# Altium PCB 血压计.PcbDoc
Units mm, origin at the board's own origin, x right, y up, seen from the top; angles counter-clockwise.
Board outline 49.53 x 49.53 mm, 4 copper layers (Top Layer, Internal Plane 1, Internal Plane 2, Bottom Layer); 26 components, 29 nets, 84 pads, 41 vias.
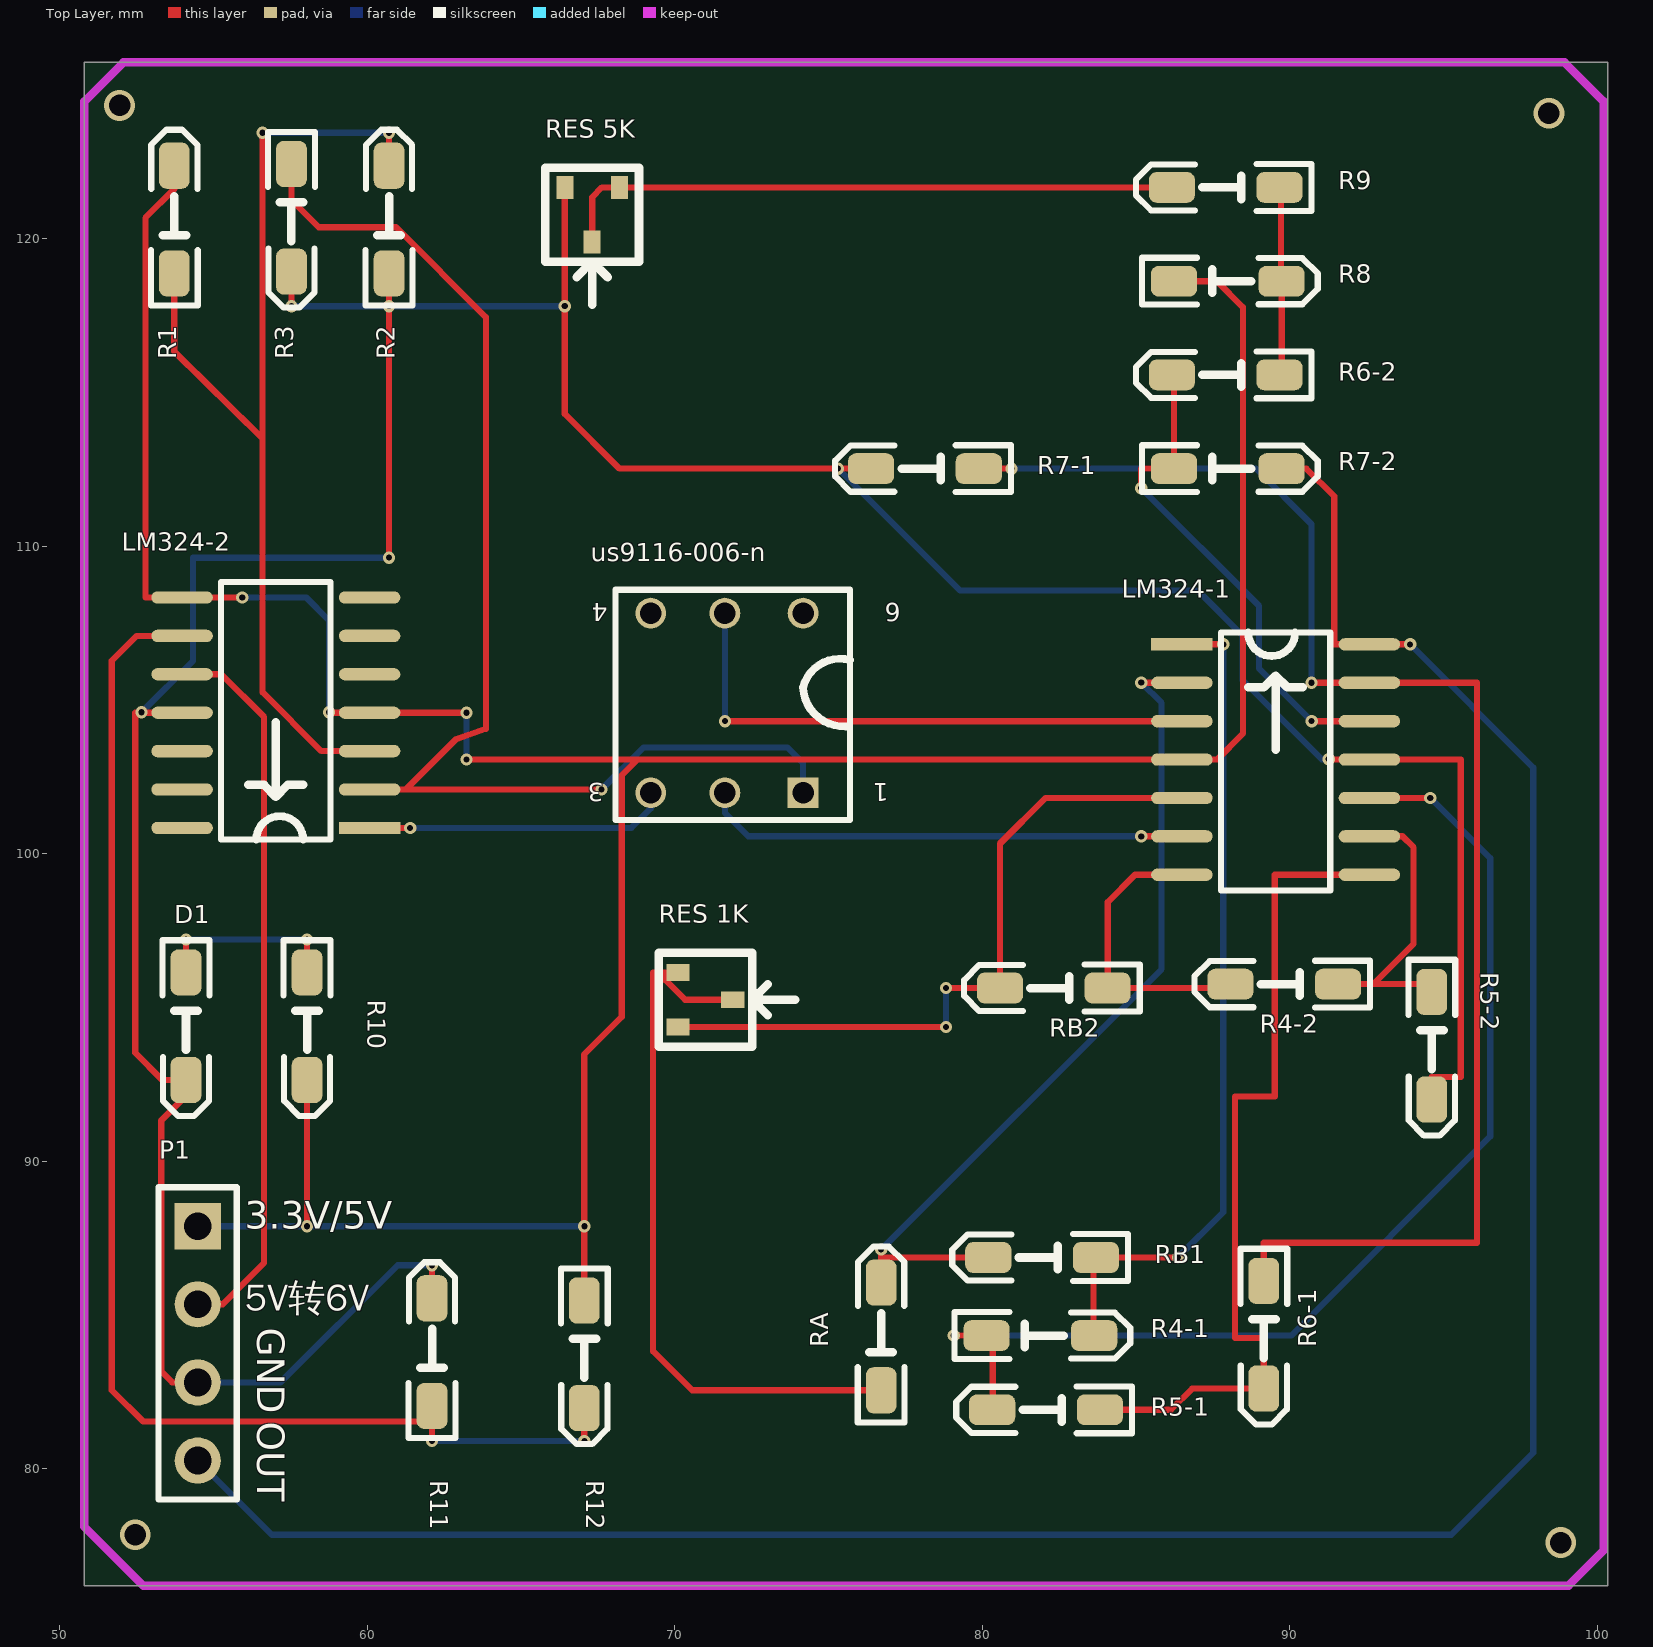
[diagram p0: Top Layer view]
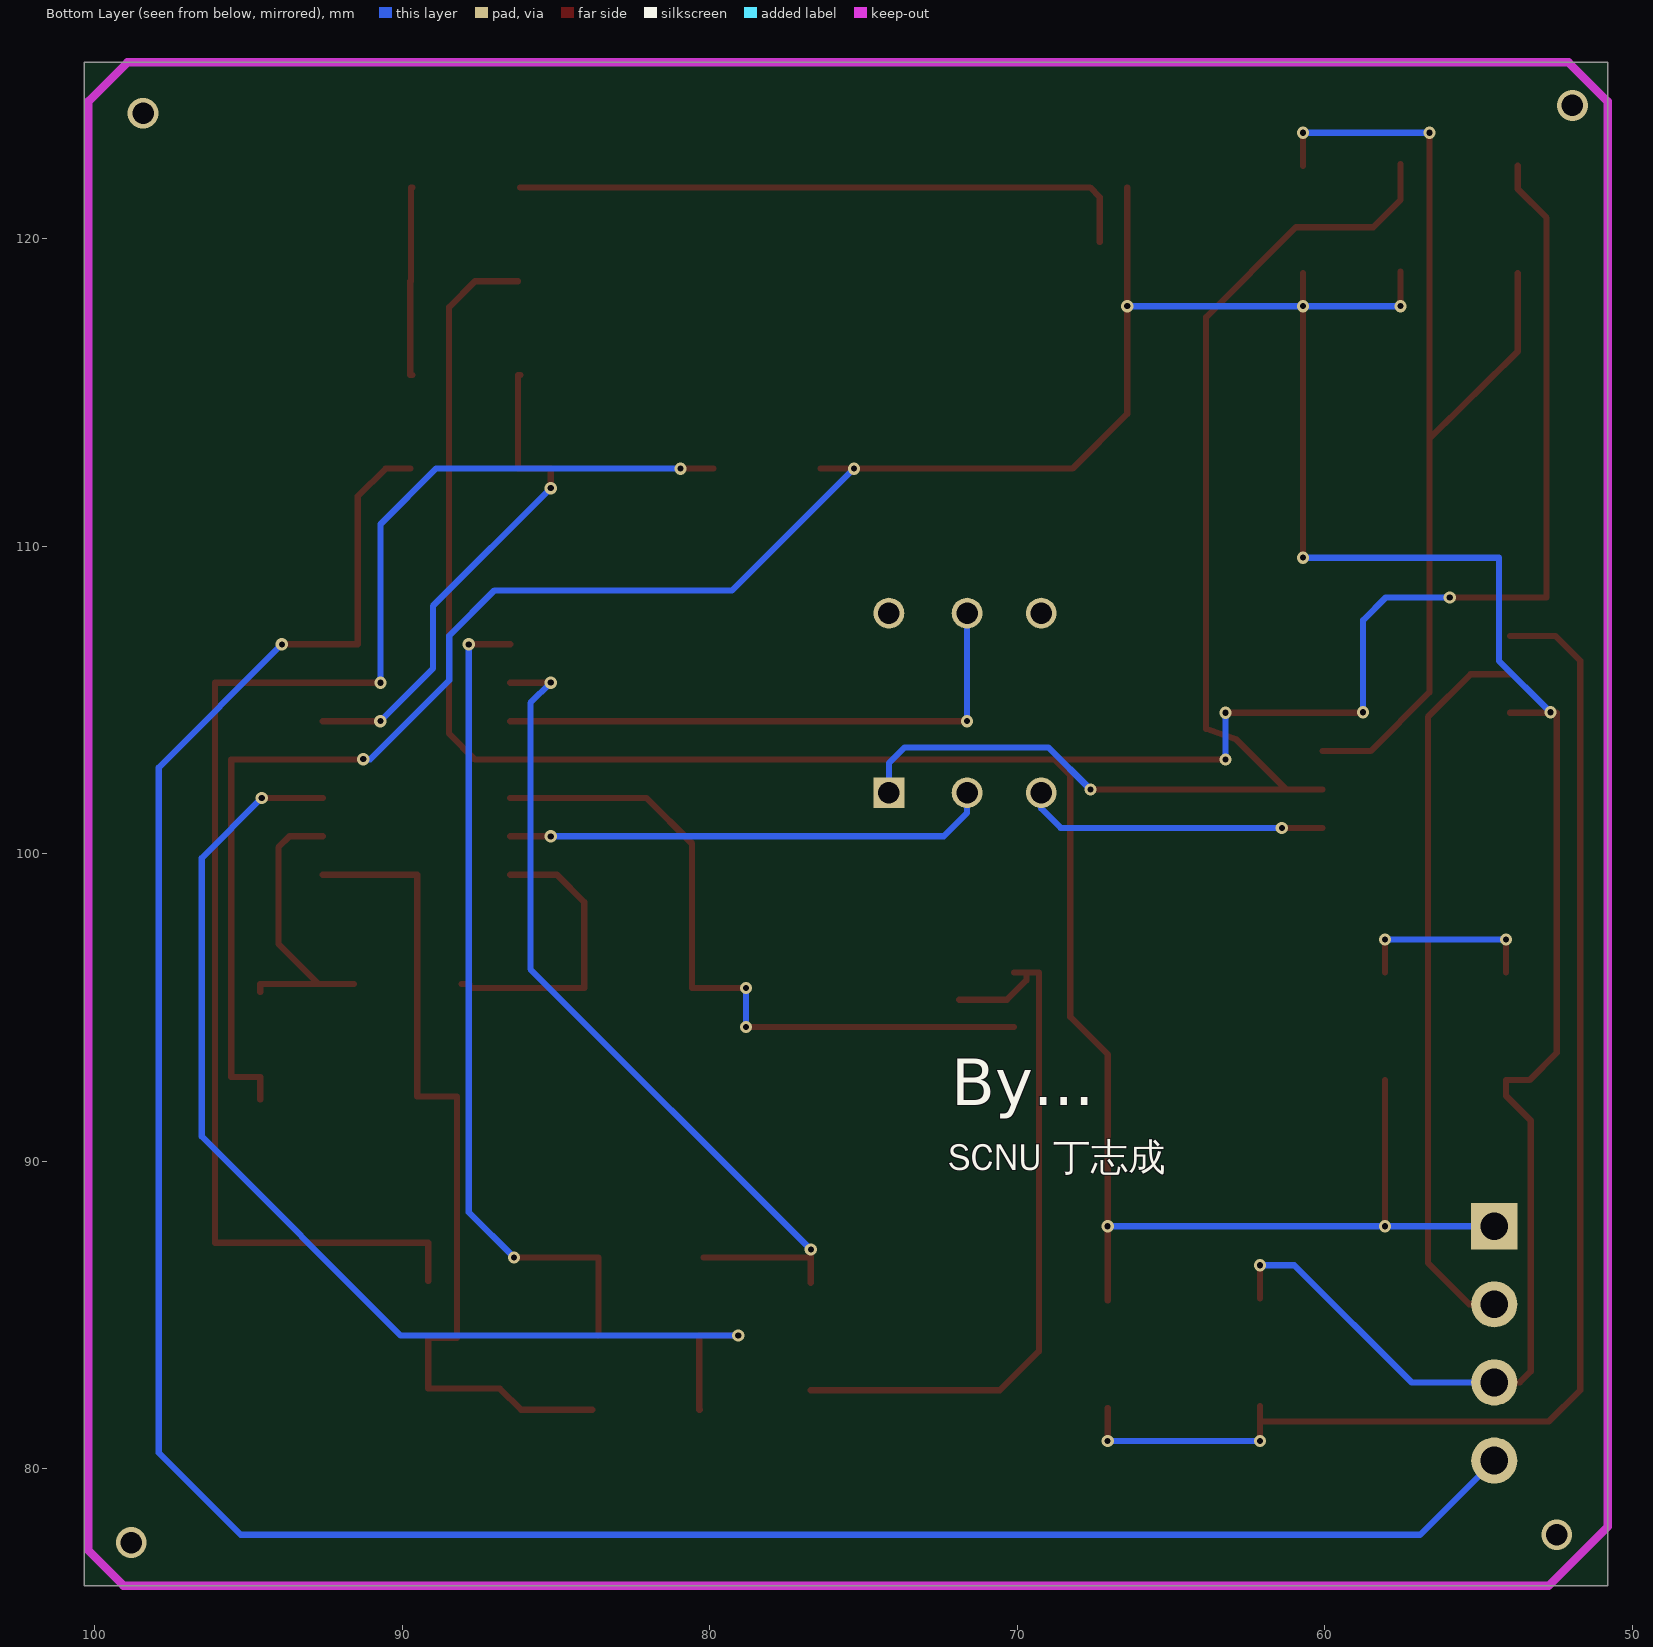
[diagram p1: Bottom Layer view, seen from below]
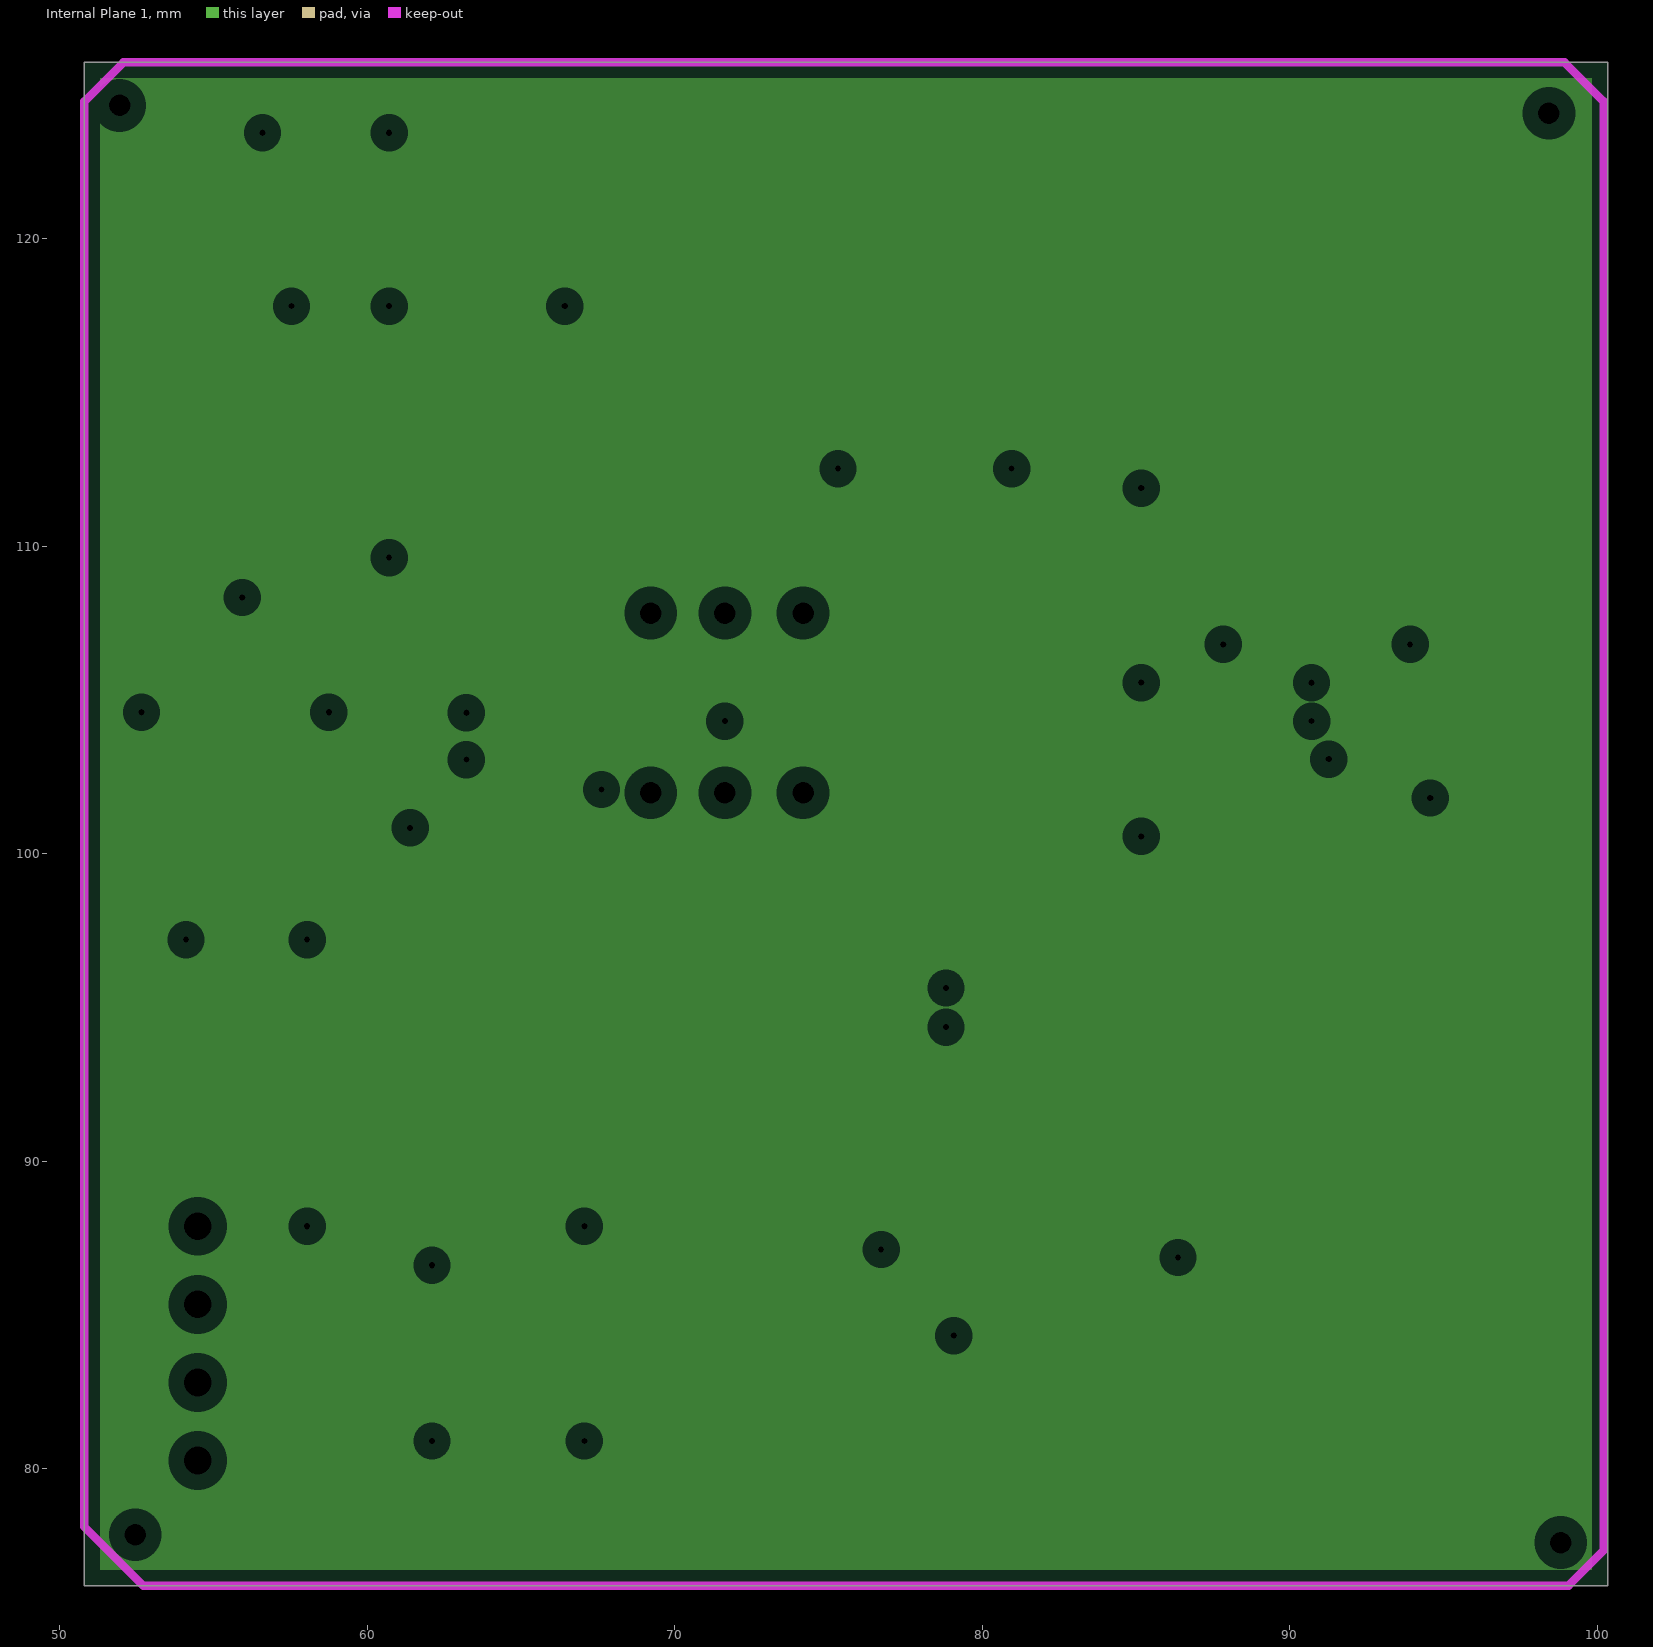
[diagram p2: Internal Plane 1, clearances drawn from the general rule]
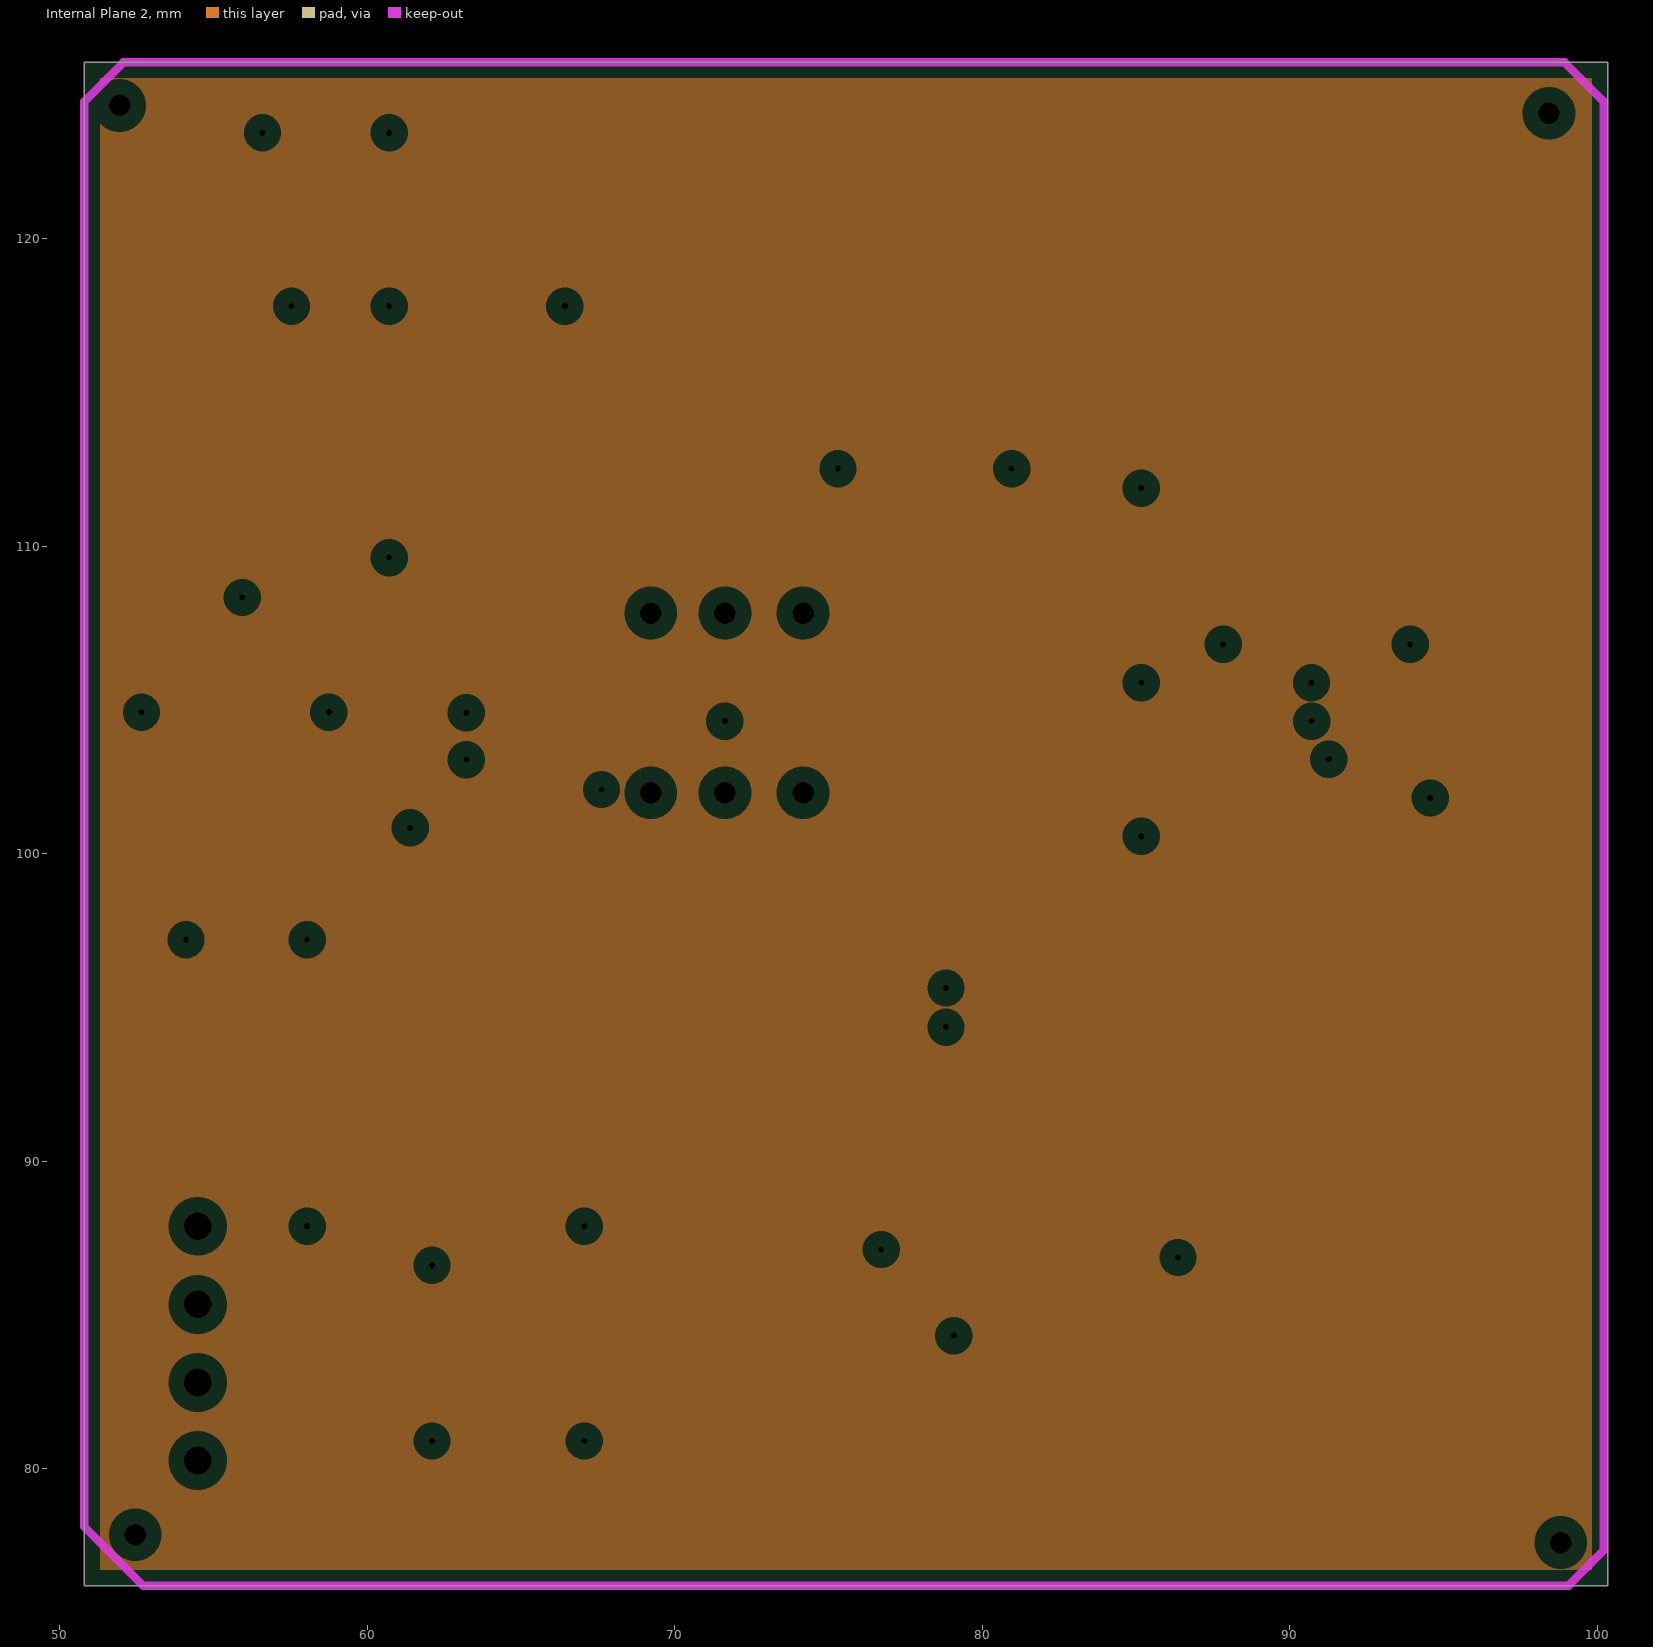
[diagram p3: Internal Plane 2, clearances drawn from the general rule]

## Layer stack, top to bottom
Top Layer: signal copper 0.0356
Dielectric: dielectric 0.32, FR-4, Dk 4.8
Internal Plane 1: plane copper 0.0356
Dielectric: dielectric 0.32, FR-4, Dk 4.8
Internal Plane 2: plane copper 0.0356
Dielectric: dielectric 0.32, FR-4, Dk 4.8
Bottom Layer: signal copper 0.0356

## Board outline
50.8,76.2 100.33,76.2 100.33,125.73 50.8,125.73

## Design rules (kind name [scope] priority, off if disabled: settings)
Clearance [All] p1: gap=0.33
PlaneClearance [All] p1: clearance=0.508
PlaneConnect [All] p1: planeconnectstyle=Relief reliefexpansion=0.508 reliefentries=4 reliefconductorwidth=0.254 reliefairgap=0.254
PolygonConnect [All] p1: connectstyle=Relief reliefconductorwidth=0.254 reliefentries=4 polygonreliefangle="90 Angle" airgapwidth=0.254
RoomDefinition 4.血压计 [InComponentClass('4.血压计')] p1: confinementstyle=ConfineIn formatcopy=TRUE lockcomponents=FALSE outline 0,0 50.8,0 50.8,25.4 0,25.4
RoutingVias [All] p1: holewidth=0.2 width=0.4 viastyle="Through Hole" minholewidth=0.2 minwidth=0.4 maxholewidth=0.2 maxwidth=0.4
SolderMaskExpansion [All] p1: expansion=0.102
Width [All] p1: maxlimit=0.203 minlimit=0.203 preferedwidth=0.203
26 further rules are at their usual default settings.

## Components (designator, comment, footprint, x,y, rotation, side; value= is the part's Value field where it differs from the comment)
D1 "LED3" "LED/CAP/RES 0603" 54.102,96.139 r270 top
LM324-1 "LM324" LM324 86.487,106.807 r0 top
LM324-2 "LM324" LM324 60.071,100.838 r180 top
P1 "Header 4" HDR1X4 54.483,87.884 r270 top
R1 "Res1" "LED/CAP/RES 0603" 53.721,118.872 r90 top
R2 "Res1" "LED/CAP/RES 0603" 60.706,118.872 r90 top
R3 "Res1" "LED/CAP/RES 0603" 57.531,122.428 r270 top
R4-1 "Res1" "LED/CAP/RES 0603" 80.137,84.328 r0 top
R4-2 "Res1" "LED/CAP/RES 0603" 91.567,95.758 r180 top
R5-1 "Res1" "LED/CAP/RES 0603" 83.82,81.915 r180 top
R5-2 "Res1" "LED/CAP/RES 0603" 94.615,95.504 r270 top
R6-1 "Res1" "LED/CAP/RES 0603" 89.154,86.106 r270 top
R6-2 "Res1" "LED/CAP/RES 0603" 89.662,115.57 r180 top
R7-1 "Res1" "LED/CAP/RES 0603" 79.883,112.522 r180 top
R7-2 "Res1" "LED/CAP/RES 0603" 86.233,112.522 r0 top
R8 "Res1" "LED/CAP/RES 0603" 86.233,118.618 r0 top
R9 "Res1" "LED/CAP/RES 0603" 89.662,121.666 r180 top
R10 "Res1" "LED/CAP/RES 0603" 58.039,96.139 r270 top
R11 "Res1" "LED/CAP/RES 0603" 62.103,82.042 r90 top
R12 "Res1" "LED/CAP/RES 0603" 67.056,85.471 r270 top
RA "Res1" "LED/CAP/RES 0603" 76.708,82.55 r90 top
RB1 "Res1" "LED/CAP/RES 0603" 83.693,86.868 r180 top
RB2 "Res1" "LED/CAP/RES 0603" 84.074,95.631 r180 top
"RES 1K" "RES POT" "RES POT" 70.612,98.679 r270 top
"RES 5K" "RES POT" "RES POT" 70.739,121.158 r180 top
us9116-006-n "us9116-006-n" us9116-006-n 74.168,101.981 r180 top

## Footprints (in the part's own frame and the unit in brackets; to place one, negate y for a bottom-side part, rotate by r counter-clockwise, add the part's x,y. Pads: shape width x height; smd on the part's side, far side on the other; paste and mask are expansions set on the pad)
HDR1X4 [mm] "Connector; Header; 4 Position"
  rect 1.5x1.5 hole 0.9: 1(0,0)
  round 1.5 hole 0.9: 2(2.54,0) 3(5.08,0) 4(7.62,0)
  silkscreen extent -1.27,-1.27 8.89,1.27
"LED/CAP/RES 0603" [mm]
  rrect50% 1.5x1 smd: 1(0,0) 2(3.5,0)
  silkscreen extent -1.04,-0.76 4.67,0.76
LM324 [mm]
  rect 2x0.4 smd: 1(0,0)
  oval 2x0.4 smd: 2(0,-1.249) 3(0,-2.498) 4(0,-3.746) 5(0,-4.995) 6(0,-6.244) 7(0,-7.493) 8(6.096,-7.493) 9(6.096,-6.244) 10(6.096,-4.995) 11(6.096,-3.746) 12(6.096,-2.498) 13(6.096,-1.249) 14(6.096,0)
  silkscreen extent 1.27,-8 4.83,0.38
"RES POT" [mm]
  rect 0.55x0.75 smd: 1(4.318,-0.508) 2(2.54,-0.508) 3(3.429,1.27)
  silkscreen extent 1.9,-1.14 4.95,3.3
us9116-006-n [mm]
  rect 1x1 hole 0.7: 1(0,0)
  round 1 hole 0.7: 2(2.54,0) 3(4.953,0) 4(4.953,-5.842) 5(2.54,-5.842) 6(0,-5.842)
  silkscreen extent -1.52,-6.6 6.1,0.89

## Part data
D1: "Typical BLUE SiC LED"
P1: "Header, 4-Pin"
R1 R2 R3 R4-1 R4-2 R5-1 R5-2 R6-1 R6-2 R7-1 R7-2 R8 R9 R10 R11 R12 RA RB1 RB2: "Resistor"

## Via types
v1: diameter 0.4, hole 0.2, Top Layer to Bottom Layer, 37 vias
v2: diameter 1, hole 0.7, Top Layer to Bottom Layer, 4 vias

## Nets (pads, with @x,y where several pads share a name; then routed paths per layer and width w, separated by ;. In a path a pad name is that pad's centre, name@x,y a point inside that pad or via, vN(x,y) a via of type N, cw(c..) or ccw(c..) an arc to the next point about the centre after c; other vN are vias at no path point)
GND: "RES 5K.1" D1.2 LM324-1.11 LM324-2.11 P1.3 R2.1 R3.2 R5-2.2 R7-1.2 R11.2 | length 122.5
  Top Layer w0.203: v1(52.654,104.597) v1@52.667,104.584 ; LM324-2.11 v1@52.667,104.584 ; P1.3 53.657,82.804 53.298,83.163 53.298,91.322 54.102,92.126 D1.2 53.335,92.639 52.451,93.523 52.451,104.584 v1@52.667,104.584 ; v1(57.531,117.805) R3.2 ; v1(60.706,109.626) v1(60.706,117.805) R2.1 ; R11.2 v1(62.103,86.614) ; 66.421,121.666 v1(66.421,117.805) 66.421,114.3 68.199,112.522 v1(75.306,112.522) R7-1.2 ; v1(91.262,103.073) 91.275,103.06 LM324-1.11 95.555,103.06 95.555,92.735 94.615,92.735 R5-2.2
  Bottom Layer w0.203: v1(52.654,104.597) 54.331,106.274 54.331,109.626 v1(60.706,109.626) ; P1.3 57.175,82.804 60.985,86.614 v1(62.103,86.614) ; v1(57.531,117.805) v1(60.706,117.805) v1(66.421,117.805) ; v1(75.306,112.522) 79.268,108.56 86.995,108.56 88.465,107.09 88.465,105.642 91.034,103.073 v1(91.262,103.073)
NetD1_1: D1.1 R10.1 | length 6.1
  Top Layer w0.203: D1.1 v1(54.102,97.206) ; R10.1 v1(58.039,97.206)
  Bottom Layer w0.203: v1(54.102,97.206) v1(58.039,97.206)
NetR6-2_1: R6-2.1 R8.2 R9.1 | length 6.2
  Top Layer w0.203: R6-2.1 89.738,115.57 89.738,118.618 R8.2 89.713,118.618 89.713,121.666 R9.1
NetR9_2: "RES 5K.2" "RES 5K.3" R9.2 | length 21
  Top Layer w0.203: 67.31,119.888 67.31,121.349 67.627,121.666 ; 68.199,121.666 67.627,121.666 ; R9.2 67.627,121.666
NetRA_1: "RES 1K.2" "RES 1K.3" RA.1 | length 23.8
  Top Layer w0.203: 70.104,96.139 69.698,96.139 ; 71.882,95.25 70.333,95.25 69.698,95.885 69.698,96.139 ; RA.1 70.561,82.55 69.291,83.82 69.291,96.139 69.698,96.139
"OP1 1 IN+": LM324-2.3 R1.1 R2.2 | length 34.2
  Top Layer w0.203: R1.1 53.721,116.332 56.591,113.487 ; v1(56.591,123.444) 56.591,113.487 ; LM324-2.3 58.505,103.336 56.591,105.25 56.591,113.487 ; R2.2 v1(60.706,123.444)
  Bottom Layer w0.203: v1(56.591,123.444) v1(60.706,123.444)
"OP1 1 IN-": LM324-2.2 R3.1 us9116-006-n.1 | length 41.6
  Top Layer w0.203: R3.1 57.531,121.26 58.42,120.371 60.935,120.371 63.856,117.45 63.856,104.064 62.865,103.708 61.244,102.087 ; LM324-2.2 61.244,102.087 ; v1(67.615,102.087) 61.244,102.087
  Bottom Layer w0.203: v1(67.615,102.087) 68.982,103.454 73.66,103.454 74.168,102.946 us9116-006-n.1
"OP1 1 OUT": LM324-2.1 us9116-006-n.3 | length 9.9
  Top Layer w0.203: LM324-2.1 v1(61.392,100.838)
  Bottom Layer w0.203: v1(61.392,100.838) 68.58,100.838 69.215,101.473 us9116-006-n.3
"OP1 2 IN+": LM324-2.5
"OP1 2 IN-": LM324-2.6
"OP1 2 OUT": LM324-2.7
"OP1 3 IN+": LM324-2.10 P1.2 | length 23.7
  Top Layer w0.203: LM324-2.10 55.253,105.833 56.642,104.445 56.642,86.69 55.296,85.344 P1.2
"OP1 3 IN-": LM324-2.9 R11.1 R12.2 | length 44.3
  Top Layer w0.203: LM324-2.9 52.498,107.082 51.689,106.274 51.689,82.55 52.705,81.534 R11.1@62.103,81.534 ; v1(62.103,80.899) R11.1@62.103,81.534 ; R11.1 R11.1@62.103,81.534 ; v1(67.056,80.899) R12.2
  Bottom Layer w0.203: v1(62.103,80.899) v1(67.056,80.899)
"OP1 3 OUT": LM324-1.4 LM324-2.4 LM324-2.8 P1.1 R1.2 R8.1 R10.2 R12.1 | length 107.4
  Top Layer w0.203: R1.2 53.721,121.615 52.781,120.675 52.781,108.331 LM324-2.8 v1(55.931,108.331) ; v1(58.039,87.884) R10.2 ; v1(58.75,104.597) 58.75,104.584 LM324-2.4 v1(63.221,104.584) ; v1(63.221,103.06) 68.783,103.06 ; R12.1 v1(67.056,87.884) 67.056,93.472 68.275,94.691 68.275,102.552 68.783,103.06 ; R8.1 87.63,118.618 88.474,117.774 88.474,103.905 87.63,103.06 LM324-1.4 68.783,103.06
  Bottom Layer w0.203: P1.1 v1(58.039,87.884) v1(67.056,87.884) ; v1(55.931,108.331) 58.014,108.331 58.75,107.594 v1(58.75,104.597) ; v1(63.221,103.06) v1(63.221,104.584)
"OP1 4 IN+": LM324-2.12
"OP1 4 IN-": LM324-2.13
"OP1 4 OUT": LM324-2.14
"OP2 1 IN+": LM324-1.3 us9116-006-n.5 | length 18.4
  Top Layer w0.203: v1(71.628,104.309) LM324-1.3
  Bottom Layer w0.203: v1(71.628,104.309) us9116-006-n.5
"OP2 1 IN-": LM324-1.2 RA.2 RB1.2 | length 28.4
  Top Layer w0.203: RA.2 76.708,86.868 ; v1(76.708,87.127) 76.708,86.868 ; RB1.2 76.708,86.868 ; v1(85.166,105.562) 85.17,105.558 LM324-1.2
  Bottom Layer w0.203: v1(76.708,87.127) 85.827,96.246 85.827,104.902 v1(85.166,105.562)
"OP2 1 OUT": LM324-1.1 R4-1.2 RB1.1 | length 27.2
  Top Layer w0.203: R4-1.2 83.617,84.328 83.617,86.868 RB1.1 v1(86.36,86.868) ; LM324-1.1 v1(87.833,106.807)
  Bottom Layer w0.203: v1(86.36,86.868) 87.833,88.341 v1(87.833,106.807)
"OP2 2 IN+": "RES 1K.1" LM324-1.5 RB2.2 | length 23
  Top Layer w0.203: 70.104,94.361 v1(78.816,94.361) ; v1(78.816,95.631) RB2.2 80.574,100.33 82.056,101.812 LM324-1.5
  Bottom Layer w0.203: v1(78.816,94.361) v1(78.816,95.631)
"OP2 2 IN-": LM324-1.6 us9116-006-n.2 | length 15.8
  Top Layer w0.203: v1(85.166,100.563) LM324-1.6
  Bottom Layer w0.203: us9116-006-n.2 71.628,101.325 72.39,100.563 v1(85.166,100.563)
"OP2 2 OUT": LM324-1.7 R4-2.2 RB2.1 | length 9.7
  Top Layer w0.203: LM324-1.7 84.963,99.314 84.074,98.425 RB2.1 87.808,95.631 87.808,95.758 R4-2.2
"OP2 3 IN+": LM324-1.10 R4-1.1 R5-1.2 | length 37.6
  Top Layer w0.203: v1(79.07,84.328) R4-1.1 80.34,84.328 80.34,81.915 R5-1.2 ; LM324-1.10 v1(94.564,101.812)
  Bottom Layer w0.203: v1(79.07,84.328) 90.043,84.328 96.52,90.805 96.52,99.856 v1(94.564,101.812)
"OP2 3 IN-": LM324-1.9 R4-2.1 R5-2.1 | length 9.9
  Top Layer w0.203: R4-2.1 92.71,95.758 ; LM324-1.9 93.662,100.563 94.022,100.204 94.022,97.07 92.71,95.758 ; R5-2.1 94.615,95.758 92.71,95.758
"OP2 3 OUT": LM324-1.8 R5-1.1 R6-1.2 | length 27.6
  Top Layer w0.203: R5-1.1 86.131,81.915 86.822,82.606 R6-1.2 89.154,84.252 88.214,84.252 88.214,92.1 89.51,92.1 89.51,99.314 LM324-1.8
"OP2 4 IN+": LM324-1.12 R6-2.2 R7-2.1 | length 16.6
  Top Layer w0.203: v1(85.166,111.887) 85.166,112.522 R7-2.1 86.233,115.57 R6-2.2 ; v1(90.708,104.309) LM324-1.12
  Bottom Layer w0.203: v1(85.166,111.887) 88.998,108.055 88.998,106.019 v1(90.708,104.309)
"OP2 4 IN-": LM324-1.13 R6-1.1 R7-1.1 | length 48.5
  Top Layer w0.203: R7-1.1 v1(80.95,112.522) ; R6-1.1 89.154,87.351 96.088,87.351 96.088,105.558 LM324-1.13 v1(90.703,105.558)
  Bottom Layer w0.203: v1(80.95,112.522) 88.9,112.522 90.703,110.719 v1(90.703,105.558)
"OP2 4 OUT": LM324-1.14 P1.4 R7-2.2 | length 82.9
  Top Layer w0.203: R7-2.2 90.538,112.522 91.44,111.62 91.44,106.807 LM324-1.14 v1(93.91,106.807)
  Bottom Layer w0.203: P1.4 56.896,77.851 95.25,77.851 97.917,80.518 97.917,102.8 v1(93.91,106.807)
pads on no net: us9116-006-n.4 us9116-006-n.6
copper on no net:
  other v2: 98.806,77.597 52.451,77.851 98.425,124.079 51.943,124.333

## Polygon pours and split planes (outlines as drawn)
GND on Top Layer "Top Layer-No Net" (solid, remove dead copper, pour order 2): -8.279,80.882 -6.882,82.279 59.412,82.279 59.412,26.653 56.237,23.478 55.729,22.97 -3.58,22.97 -7.136,22.97 -7.517,22.589
GND on Bottom Layer "Top Layer-No Net" (solid, remove dead copper, pour order 4): -26.258,130.288 44.1,130.288 44.1,70.598 36.48,62.978 30.765,68.693 -29.179,68.693
no net on Internal Plane 1 (split plane): 99.82,76.71 51.31,76.71 51.31,125.22 99.82,125.22
no net on Internal Plane 2 (split plane): 99.82,76.71 51.31,76.71 51.31,125.22 99.82,125.22

## Keep-outs
Keep-Out Layer:
  lines w0.278: 50.8,78.105 50.8,124.46 52.07,125.73 98.933,125.73 100.203,124.46 100.203,77.724 100.203,77.343 99.06,76.2 52.705,76.2 50.8,78.105

## Silkscreen, mask and mechanical layers (free items; w line width, h text height)
Top Overlay:
  lines w0.254: 75.565,104.14 cw(c75.501,105.474) 74.168,105.41 cw(c75.374,105.093) 75.692,106.299
  text "3.3V/5V" at 56.007,87.503 h1.52
  text "5V转6V" at 56.007,84.836 h1.52
  text "GND" at 56.134,84.582 h1.52 r270
  text "OUT" at 56.134,81.534 h1.52 r270
Bottom Overlay:
  text "By..." at 72.136,91.821 h1.52
  text "SCNU 丁志成" at 72.263,89.408 h1.52

## Text inside footprints (layer, text, board x,y; h text height)
us9116-006-n: Top Overlay "6" at 77.343,108.331 h1.02 r180; Top Overlay "4" at 67.818,108.331 h1.02 r180; Top Overlay "3" at 67.691,102.489 h1.02 r180; Top Overlay "1" at 76.962,102.489 h1.02 r180